# Altium PCB PCI_Express_Mini_MC.PCBDOC
Units mm, origin at the board's own origin, x right, y up, seen from the top; angles counter-clockwise.
Board outline 39.75 x 21.25 mm, 2 copper layers (TopLayer, BottomLayer); 1 components, 27 nets, 56 pads, 0 vias.
Unrouted connection lines stored in the file: 19.
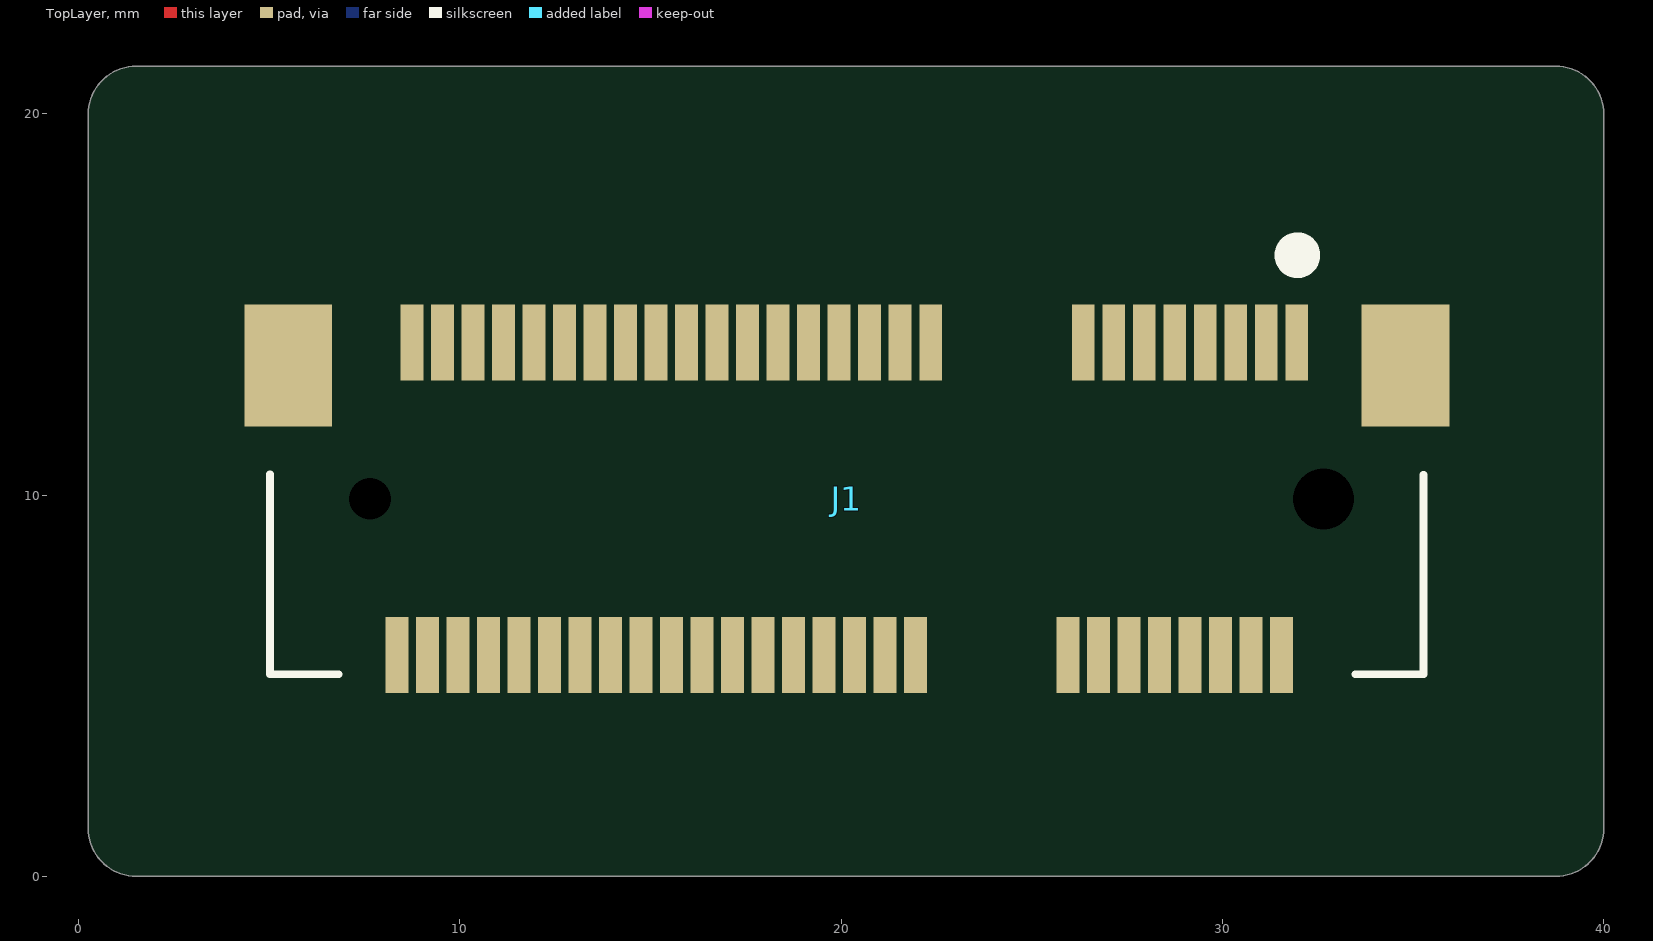
[diagram p0: TopLayer view]
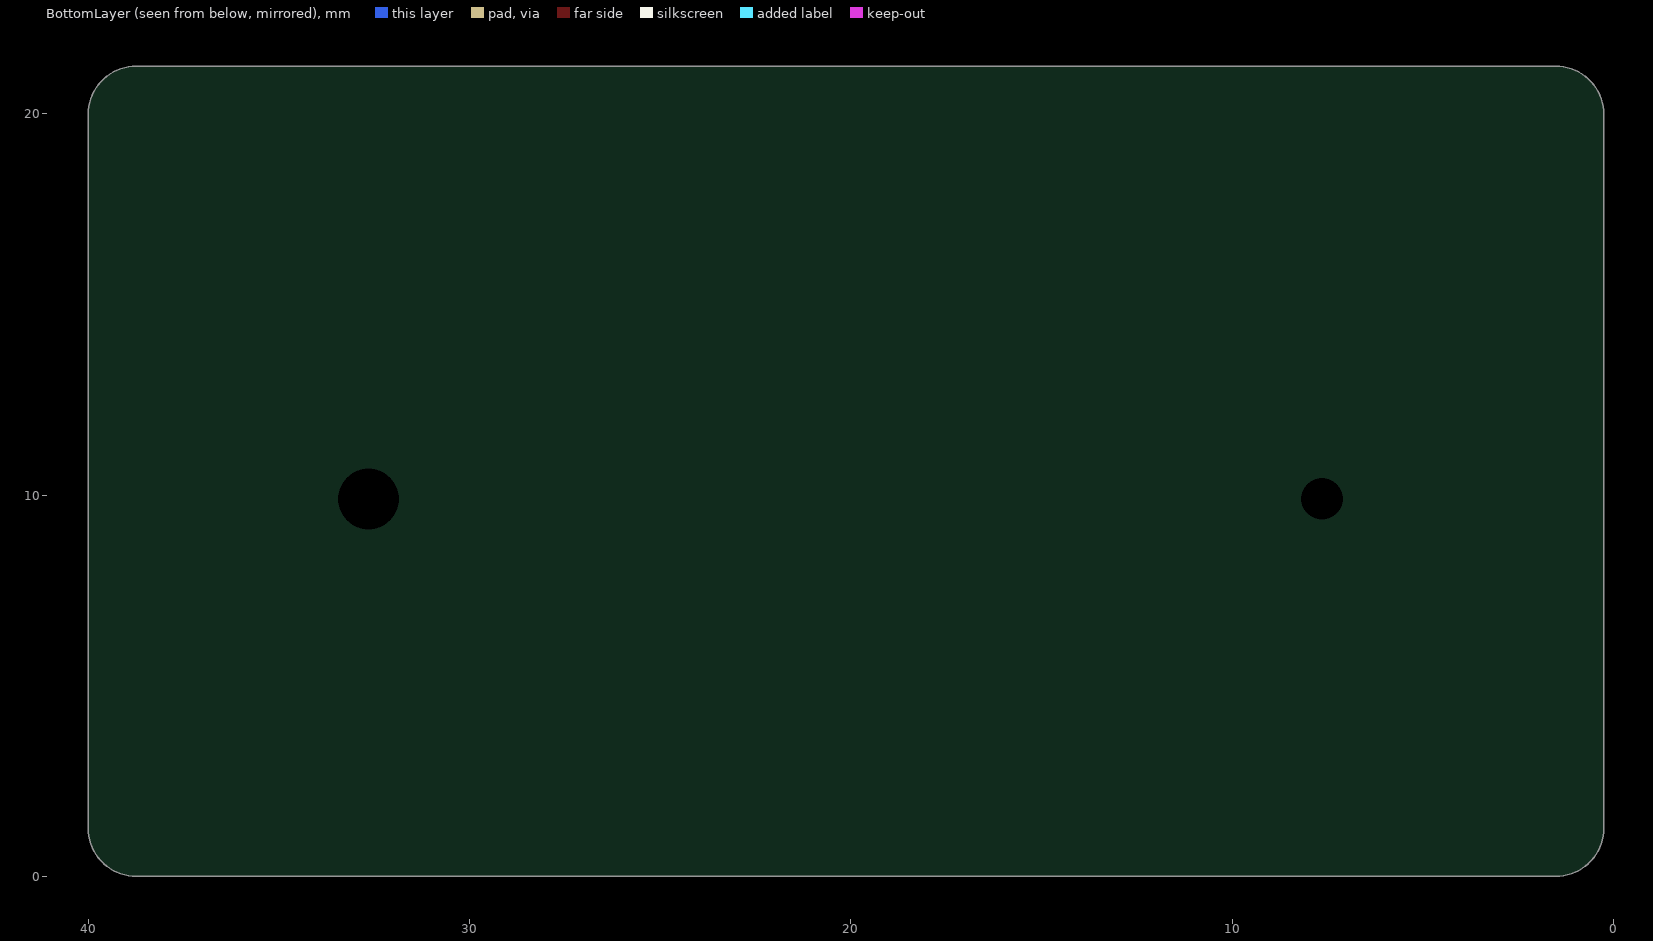
[diagram p1: BottomLayer view, seen from below]

## Layer stack, top to bottom
TopLayer: signal copper 0.0178
Dielectric: core 0.32, FR-4, Dk 4.8
BottomLayer: signal copper 0.0178

## Board outline
0.25,1.27 ccw(c1.52,1.27) 1.52,0 38.73,0 ccw(c38.73,1.27) 40,1.27 40,19.98 ccw(c38.73,19.98) 38.73,21.25 1.52,21.25 ccw(c1.52,19.98) 0.25,19.98

## Design rules (kind name [scope] priority, off if disabled: settings)
Clearance [All] p1: gap=0.2
DiffPairsRouting [All] p1: maxlimit=0.254 minlimit=0.254 mostfreqgap=0.254 maxuncoupledlength=12.7
FabricationTestPointUsage TestPointUsage [All] p1: valid=0 allowmultiple=FALSE
FabricationTestpoint Testpoint [All] p1: side=3 testpointundercomponent=TRUE minsize=1.016 maxsize=2.54 preferedsize=1.524 minholesize=0.508 maxholesize=1.016 preferedholesize=0.813 testpointgrid=0.025 allowsidetop=TRUE allowsidebottom=TRUE usegrid=TRUE gridtolerance=0
PlaneClearance [All] p1: clearance=0.5
PolygonConnect [All] p1: connectstyle=Relief reliefconductorwidth=0.254 reliefentries=4 polygonreliefangle="90 Angle"
RoomDefinition "U_CON_MC_PCI Express Mini_J1_52PIN" [InComponentClass('U_CON_MC_PCI Express Mini_J1_52PIN')] p1: confinementstyle=ConfineIn formatcopy=TRUE lockcomponents=FALSE outline 3.792,4.25 3.792,17.146 36.5,17.146 36.5,4.25
RoutingVias [All] p1: holewidth=0.711 width=1.27 viastyle="Through Hole" minholewidth=0.711 minwidth=1.27 maxholewidth=0.711 maxwidth=1.27
SilkscreenOverComponentPads [All] p1: minsilkscreentomaskgap=0.254
SolderMaskExpansion [All] p1: expansion=0.102
Width [All] p1: maxlimit=0.254 minlimit=0.254 preferedwidth=0.254
23 further rules are at their usual default settings.

## Classes and differential pairs
differential pair PER0: +PER0_P -PER0_N
differential pair PET0: +PET0_P -PET0_N
differential pair REFCLK: +REFCLK_P -REFCLK_N
differential pair USB_D: +USB_D_P -USB_D_N

## Components (designator, comment, footprint, x,y, rotation, side; value= is the part's Value field where it differs from the comment)
J1 "292443-1" BTB-SM0-8-2H52F 20.146,9.904 r180 top

## Footprints (in the part's own frame and the unit in brackets; to place one, negate y for a bottom-side part, rotate by r counter-clockwise, add the part's x,y. Pads: shape width x height; smd on the part's side, far side on the other; paste and mask are expansions set on the pad)
BTB-SM0-8-2H52F [mm] "Board-to-Board Connector, SMT, Right Angle, Pitch 0.8mm, 52-Position, Female"
  rect 0.6x2 smd: 1(-11.8,-4.1) 2(-11.4,4.1) 3(-11,-4.1) 4(-10.6,4.1) 5(-10.2,-4.1) 6(-9.8,4.1) 7(-9.4,-4.1) 8(-9,4.1) 9(-8.6,-4.1) 10(-8.2,4.1) 11(-7.8,-4.1) 12(-7.4,4.1) 13(-7,-4.1) 14(-6.6,4.1) 15(-6.2,-4.1) 16(-5.8,4.1) 17(-2.2,-4.1) 18(-1.8,4.1) 19(-1.4,-4.1) 20(-1,4.1) 21(-0.6,-4.1) 22(-0.2,4.1) 23(0.2,-4.1) 24(0.6,4.1) 25(1,-4.1) 26(1.4,4.1) 27(1.8,-4.1) 28(2.2,4.1) 29(2.6,-4.1) 30(3,4.1) 31(3.4,-4.1) 32(3.8,4.1) 33(4.2,-4.1) 34(4.6,4.1) 35(5,-4.1) 36(5.4,4.1) 37(5.8,-4.1) 38(6.2,4.1) 39(6.6,-4.1) 40(7,4.1) 41(7.4,-4.1) 42(7.8,4.1) 43(8.2,-4.1) 44(8.6,4.1) 45(9,-4.1) 46(9.4,4.1) 47(9.8,-4.1) 48(10.2,4.1) 49(10.6,-4.1) 50(11,4.1) 51(11.4,-4.1) 52(11.8,4.1)
  round 1.3 hole 1.6 unplated: MH1(-12.5,0)
  round 0.8 hole 1.1 unplated: MH2(12.5,0)
  rect 2.3x3.2 smd: MP1(-14.65,-3.5) MP2(14.65,-3.5)
  silkscreen extent -15.12,-6.69 15.12,4.6, body extent -15,-5 15,4.5, height 5.6

## Part data
J1: library part CMP-0001-00120-1, "Board-to-Board Connector, SMT, Right Angle, Pitch 0.8mm, 52-Position, Female"

## Nets (pads, with @x,y where several pads share a name; then routed paths per layer and width w, separated by ;. In a path a pad name is that pad's centre, name@x,y a point inside that pad or via, vN(x,y) a via of type N, cw(c..) or ccw(c..) an arc to the next point about the centre after c; other vN are vias at no path point)
+1.5V: J1.6 J1.28 J1.48
+3.3VAUX: J1.2 J1.24 J1.39 J1.41 J1.52
CLKREQ#: J1.7
COEX1: J1.3
COEX2: J1.5
GND: J1.4 J1.9 J1.15 J1.18 J1.21 J1.26 J1.27 J1.29 J1.34 J1.35 J1.37 J1.40 J1.43 J1.50
LED_WLAN#: J1.44
LED_WPAN#: J1.46
LED_WWAN#: J1.42
PER0_N: J1.23
PER0_P: J1.25
PERST#: J1.22
PET0_N: J1.31
PET0_P: J1.33
REFCLK_N: J1.11
REFCLK_P: J1.13
SMB_CLK: J1.30
SMB_DATA: J1.32
UIM_CLK: J1.12
UIM_DATA: J1.10
UIM_PWR: J1.8
UIM_RESET: J1.14
UIM_VPP: J1.16
USB_D_N: J1.36
USB_D_P: J1.38
W_DISABLE#: J1.20
WAKE#: J1.1
pads on no net: J1.17 J1.19 J1.45 J1.47 J1.49 J1.51 J1.MH1 J1.MH2 J1.MP1 J1.MP2

## Silkscreen, mask and mechanical layers (free items; w line width, h text height)
<> Outline:
  lines w0.254: 0.25,1.27 ccw(c1.52,1.27) 1.52,0 5,0 38.73,0 ccw(c38.73,1.27) 40,1.27 40,19.98 ccw(c38.73,19.98) 38.73,21.25 1.52,21.25 ccw(c1.52,19.98) 0.25,19.98 0.25,1.27
<> Notes:
  text ".Template Source Name" at 43.25,5.288 h1
  text ".Template Source Organization" at 43.25,3.256 h1